# Altium PCB ORD_POT_PCB.PcbDoc
Units mm, origin at the board's own origin, x right, y up, seen from the top; angles counter-clockwise.
Board outline 100 x 63.5 mm, 2 copper layers (Top Layer, Bottom Layer); 16 components, 34 nets, 106 pads, 0 vias.
Unrouted connection lines stored in the file: 2.
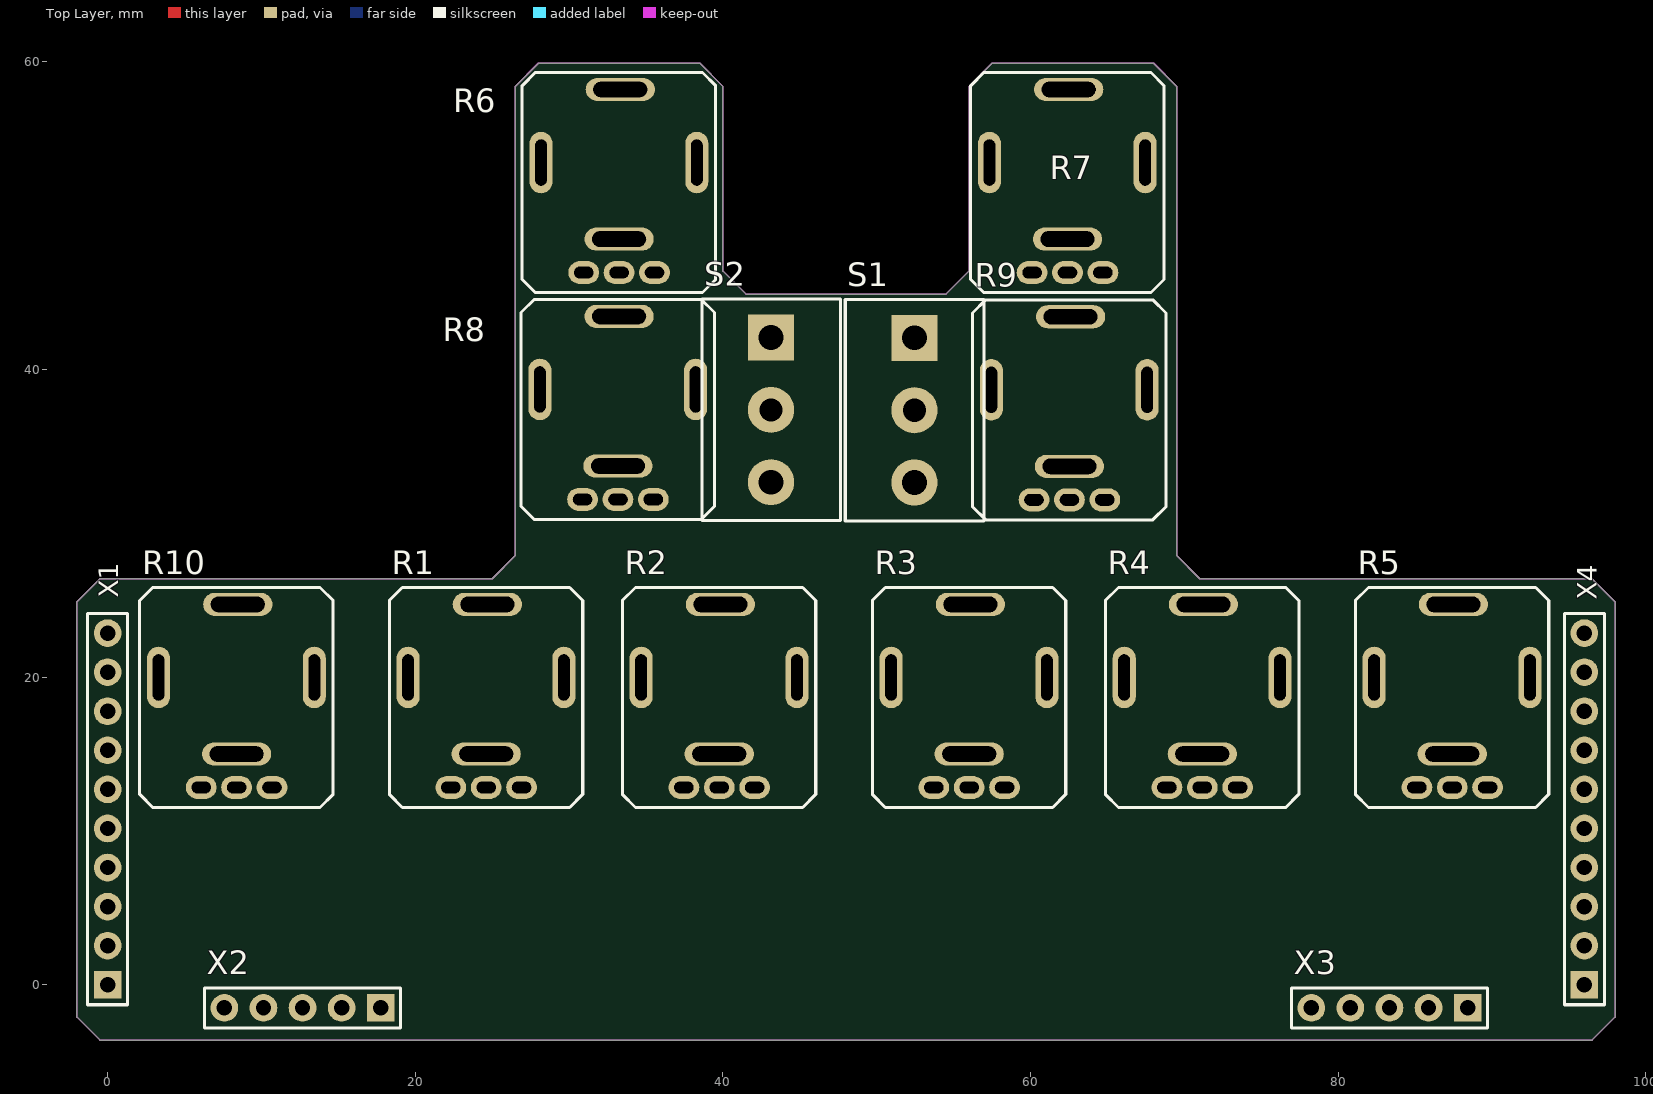
[diagram p0: Top Layer view]
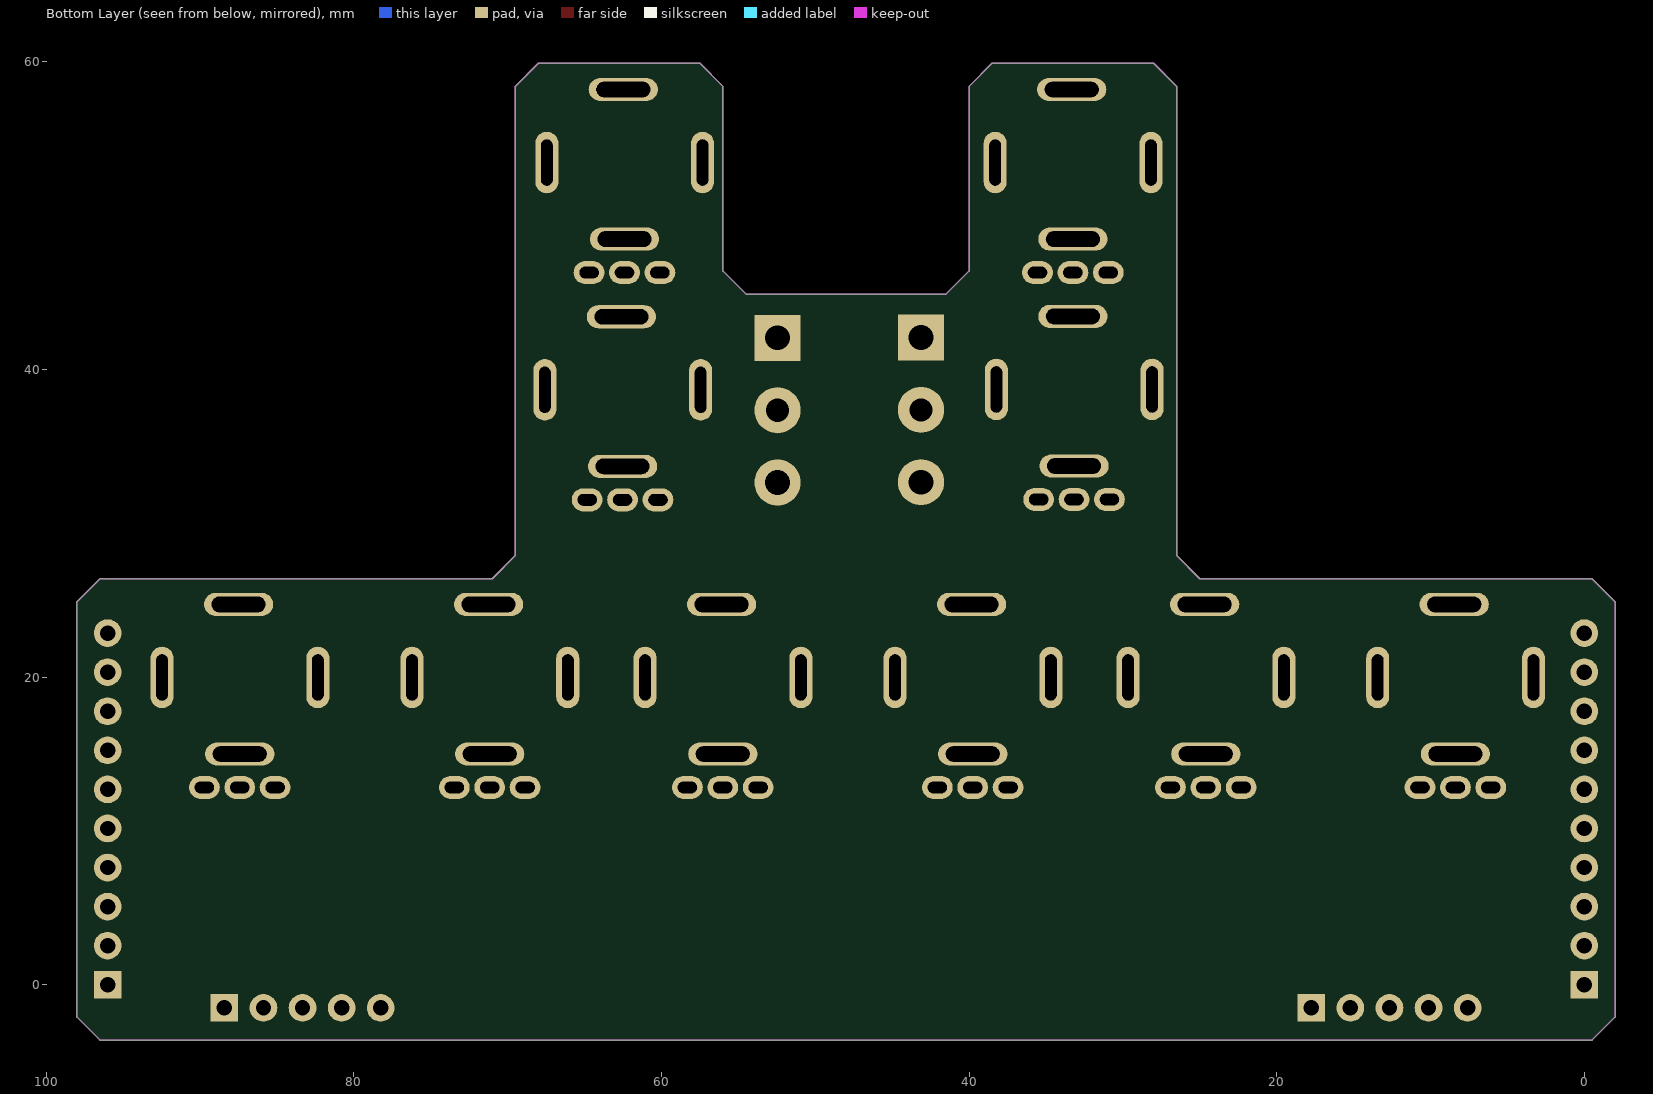
[diagram p1: Bottom Layer view, seen from below]

## Layer stack, top to bottom
Top Solder: solder mask 0.0102, Solder Resist, Dk 3.5
Top Layer: signal copper 0.0356
Dielectric 1: dielectric 0.32, FR-4, Dk 4.8
Bottom Layer: signal copper 0.0356
Bottom Solder: solder mask 0.0102, Solder Resist, Dk 3.5

## Board outline
-2,-2.1 -0.5,-3.6 96.5,-3.6 98,-2.1 98,24.9 96.5,26.4 71,26.4 69.5,27.9 69.5,58.4 68,59.9 57.5,59.9 56,58.4 56,46.4 54.5,44.9 41.5,44.9 40,46.4 40,58.4 38.5,59.9 28,59.9 26.5,58.4 26.5,27.9 25,26.4 -0.5,26.4 -2,24.9

## Design rules (kind name [scope] priority, off if disabled: settings)
Clearance [All] p1: gap=0.25 ignorepadtopadclearanceinfootprint=FALSE except(0: Arc-Hole Track-Hole SMDPad-Hole THPad-Hole Via-Hole Fill-Hole Poly-Hole Region-Hole Text-Hole)
Height [All] p1: minheight=0 maxheight=50 prefheight=12.7
PolygonConnect [All] p1: connectstyle=Relief reliefconductorwidth=0.254 reliefentries=4 polygonreliefangle="90 Angle" airgapwidth=0.254
RoutingVias [All] p1: holewidth=1 width=2 viastyle="Through Hole" minholewidth=0.7 minwidth=1.5 maxholewidth=10 maxwidth=10
SolderMaskExpansion [All] p1: expansion=0.102
Width [All] p1: maxlimit=3 minlimit=0.25 preferedwidth=0.25 minimp=50.000000 maximp=50.000000 favimp=50.000000
29 further rules are at their usual default settings.

## Components (designator, comment, footprint, x,y, rotation, side; value= is the part's Value field where it differs from the comment)
R1 "B100K" RK097 22.31,12.826 r0 top
R2 "B10K" RK097 37.46,12.826 r0 top
R3 "B10K" RK097 53.711,12.826 r0 top
R4 "B10K" RK097 68.862,12.826 r0 top
R5 "B10K" RK097 85.112,12.826 r0 top
R6 "B100K" RK097 30.95,46.3 r0 top
R7 "B10K" RK097 60.1,46.3 r0 top
R8 "B10K" RK097 30.875,31.55 r0 top
R9 "B10K" RK097 60.225,31.525 r0 top
R10 "B10K" RK097 6.084,12.826 r0 top
S1 "MTS-103" MTS-103 52.45,42.05 r270 top
S2 "MTS-103" MTS-103 43.125,42.075 r270 top
X1 "PLS10" PLS-10 0,0 r90 top
X2 "PLS5" PLS-5 17.75,-1.5 r180 top
X3 "PLS5" PLS-5 88.41,-1.5 r180 top
X4 "PLS10" PLS-10 96,0 r90 top

## Footprints (in the part's own frame and the unit in brackets; to place one, negate y for a bottom-side part, rotate by r counter-clockwise, add the part's x,y. Pads: shape width x height; smd on the part's side, far side on the other; paste and mask are expansions set on the pad)
MTS-103 [mm] "Switch ON-OFF-ON"
  rect 3x3 hole 1.6: 1(0,0)
  round 3 hole 1.5: 2(4.7,0)
  round 3 hole 1.6: 3(9.4,0)
  silkscreen extent -2.5,-4.5 11.9,4.52, body extent -1.9,-3.95 11.3,3.95, height 28.84
PLS-5 [mm]
  rect 1.8x1.8 hole 1: 1(0,0)
  round 1.8 hole 1: 2(2.54,0) 3(5.08,0) 4(7.62,0) 5(10.16,0)
  silkscreen extent -1.3,-1.3 11.46,1.3, body extent -1.27,-1.27 11.43,1.27, height 2.5
PLS-10 [mm]
  rect 1.8x1.8 hole 1: 1(0,0)
  round 1.8 hole 1: 2(2.54,0) 3(5.08,0) 4(7.62,0) 5(10.16,0) 6(12.7,0) 7(15.24,0) 8(17.78,0) 9(20.32,0) 10(22.86,0)
  silkscreen extent -1.3,-1.3 24.13,1.3, body extent -1.27,-1.27 24.13,1.27, height 2.5
RK097 [mm]
  oval 2x1.5 hole 0.75 slot 1.25 at 0 deg: 1(0,0) 2(2.3,0) 3(4.6,0)
  oval 1.5x4 hole 0.75 slot 3 at 90 deg: 4(-2.775,7.15) 4(7.35,7.15)
  oval 4.5x1.5 hole 1 slot 3.5 at 0 deg: 4(2.3,2.175) 4(2.375,11.9)
  silkscreen extent -4,-1.3 8.57,13, body extent -3,-0.15 7.6,12.15, height 23.1

## Part data
R1 R2 R3 R4 R5 R6 R7 R8 R9 R10: library part RK097
S1 S2: "Switch, ON-OFF-ON"
X1 X2 X3 X4: "2.54 mm", System=Connector

## Nets (pads, with @x,y where several pads share a name; then routed paths per layer and width w, separated by ;. In a path a pad name is that pad's centre, name@x,y a point inside that pad or via, vN(x,y) a via of type N, cw(c..) or ccw(c..) an arc to the next point about the centre after c; other vN are vias at no path point)
A_3V3: S1.2
A_CTRL0_1: R3.1
A_CTRL0_2: R3.2
A_CTRL0_3: R3.3
A_CTRL1_1: R4.1
A_CTRL1_2: R4.2
A_CTRL1_3: R4.3
A_CTRL2_1: R5.1
A_CTRL2_2: R5.2
A_CTRL2_3: R5.3
A_MIX_1: R2.1
A_MIX_2: R2.2
A_MIX_3: R2.3
A_SW_1: S1.1
A_SW_3: S1.3
A_VOL_1: R1.1
A_VOL_3: R1.2 R1.3
B_3V3: S2.2
B_CTRL0_1: R8.1
B_CTRL0_2: R8.2
B_CTRL0_3: R8.3
B_CTRL1_1: R9.1
B_CTRL1_2: R9.2
B_CTRL1_3: R9.3
B_CTRL2_1: R10.1
B_CTRL2_2: R10.2
B_CTRL2_3: R10.3
B_MIX_1: R7.1
B_MIX_2: R7.2
B_MIX_3: R7.3
B_SW_1: S2.1
B_SW_3: S2.3
B_VOL_1: R6.1
B_VOL_3: R6.2 R6.3
pads on no net: R1.4 R2.4 R3.4 R4.4 R5.4 R6.4 R7.4 R8.4 R9.4 R10.4 X1.1 X1.2 X1.3 X1.4 X1.5 X1.6 X1.7 X1.8 X1.9 X1.10 X2.1 X2.2 X2.3 X2.4 X2.5 X3.1 X3.2 X3.3 X3.4 X3.5 X4.1 X4.2 X4.3 X4.4 X4.5 X4.6 X4.7 X4.8 X4.9 X4.10

## Keep-outs
Keep-Out Layer:
  lines w0.1: -2,-2.1 -0.5,-3.6 96.5,-3.6 98,-2.1 98,24.9 96.5,26.4 71,26.4 69.5,27.9 69.5,58.4 68,59.9 57.5,59.9 56,58.4 56,46.4 54.5,44.9 48,44.9 41.5,44.9 40,46.4 40,58.4 38.5,59.9 28,59.9 26.5,58.4 26.5,27.9 25,26.4 -0.5,26.4 -2,24.9 -2,-2.1

## Silkscreen, mask and mechanical layers (free items; w line width, h text height)
Top Overlay:
  text "VOLUME" at 23.525,126.1 h1.25 r90
  text "MIX" at 39.425,126.1 h1.25 r90
  text "CNTRL#0" at 55.475,126.1 h1.25 r90
  text "CNTRL#1" at 71.425,126.1 h1.25 r90
  text "CNTRL#2" at 86.925,126.1 h1.25 r90
  text "SPEED" at 23.475,111.1 h1.25 r90
  text "DEPTH" at 39.425,111.1 h1.25 r90
  text "TIME" at 55.525,111.1 h1.25 r90
  text "MIX" at 71.425,111.1 h1.25 r90
  text "FDBCK" at 86.925,111.1 h1.25 r90